# Altium PCB PCB1.PcbDoc
Units mm, origin at the board's own origin, x right, y up, seen from the top; angles counter-clockwise.
Board outline 152.4 x 101.6 mm, 2 copper layers (Top Layer, Bottom Layer); 64 components, 44 nets, 207 pads, 0 vias.
Unrouted connection lines stored in the file: 135.
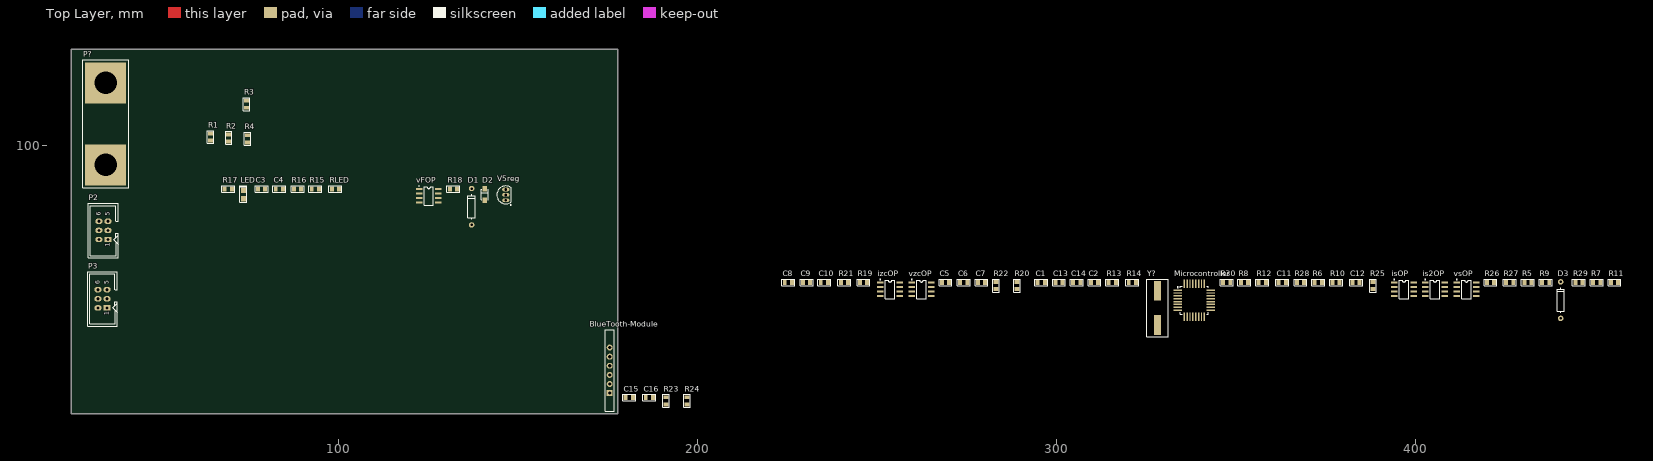
[diagram p0: Top Layer view]
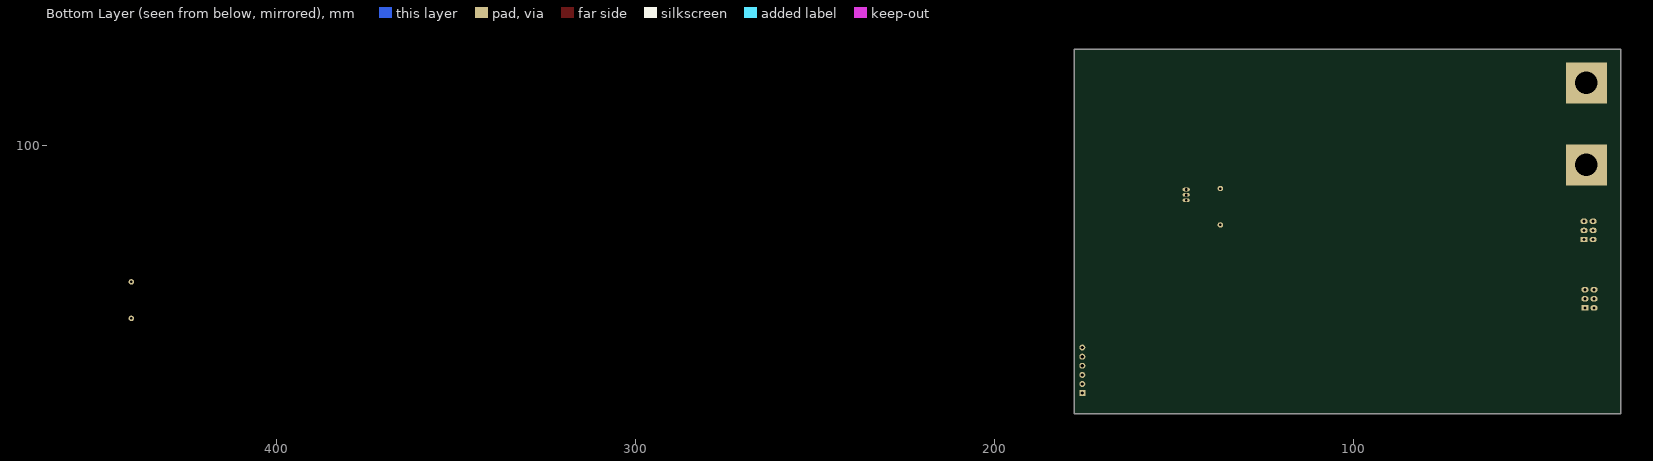
[diagram p1: Bottom Layer view, seen from below]

## Layer stack, top to bottom
Top Solder: solder mask 0.0102, Solder Resist, Dk 3.5
Top Layer: signal copper 0.0356
Dielectric 1: dielectric 0.32, FR-4, Dk 4.8
Bottom Layer: signal copper 0.0356
Bottom Solder: solder mask 0.0102, Solder Resist, Dk 3.5

## Board outline
25.4,25.4 177.8,25.4 177.8,127 25.4,127

## Design rules (kind name [scope] priority, off if disabled: settings)
Clearance [All] p1: gap=0.4 ignorepadtopadclearanceinfootprint=FALSE
Height [All] p1: minheight=0 maxheight=20 prefheight=12.7
HoleSize [All] p1: absolutevalues=TRUE maxlimit=10 minlimit=0.4 maxpercent=80.000 minpercent=20.000
PolygonConnect [All] p1: connectstyle=Relief reliefconductorwidth=0.6 reliefentries=4 polygonreliefangle="90 Angle" airgapwidth=0.4
RoutingVias [All] p1: holewidth=0.711 width=1.27 viastyle="Through Hole" minholewidth=0.711 minwidth=1.27 maxholewidth=0.711 maxwidth=1.27
SilkToSilkClearance [All] p1: silktosilkclearance=0.1
SilkToSolderMaskClearance [IsPad] p1: minsilkscreentomaskgap=0.1 clearancetoexposedcopper=TRUE
SolderMaskExpansion [All] p1: expansion=0.102 istentingtop=FALSE
SupplyNets "Schematic Supply Nets_29" [InNet('SDA')] p1: voltage=0.000
SupplyNets "Schematic Supply Nets_28" [InNet('MOSI')] p2: voltage=0.000
SupplyNets "Schematic Supply Nets_27" [InNet('Vifo')] p3: voltage=0.000
SupplyNets "Schematic Supply Nets_26" [InNet('X1')] p4: voltage=0.000
SupplyNets "Schematic Supply Nets_25" [InNet('SCL')] p5: voltage=0.000
SupplyNets "Schematic Supply Nets_24" [InNet('RST')] p6: voltage=0.000
SupplyNets "Schematic Supply Nets_23" [InNet('Vipk')] p7: voltage=0.000
SupplyNets "Schematic Supply Nets_22" [InNet('5V')] p8: voltage=0.000
SupplyNets "Schematic Supply Nets_21" [InNet('Vio')] p9: voltage=0.000
SupplyNets "Schematic Supply Nets_20" [InNet('TX')] p10: voltage=0.000
SupplyNets "Schematic Supply Nets_19" [InNet('Vio2')] p11: voltage=0.000
SupplyNets "Schematic Supply Nets_18" [InNet('Vvzc')] p12: voltage=0.000
SupplyNets "Schematic Supply Nets_17" [InNet('MISO')] p13: voltage=0.000
SupplyNets "Schematic Supply Nets_16" [InNet('OC2B')] p14: voltage=0.000
SupplyNets "Schematic Supply Nets_15" [InNet('RX')] p15: voltage=0.000
SupplyNets "Schematic Supply Nets_14" [InNet('Vio1')] p16: voltage=0.000
SupplyNets "Schematic Supply Nets_13" [InNet('Vac')] p17: voltage=0.000
SupplyNets "Schematic Supply Nets_12" [InNet('Vvo')] p18: voltage=0.000
SupplyNets "Schematic Supply Nets_11" [InNet('GND')] p19: voltage=0.000
SupplyNets "Schematic Supply Nets_10" [InNet('Vvfo')] p20: voltage=0.000
SupplyNets "Schematic Supply Nets_9" [InNet('Vref')] p21: voltage=0.000
SupplyNets "Schematic Supply Nets_8" [InNet('Vizc')] p22: voltage=0.000
SupplyNets "Schematic Supply Nets_7" [InNet('Vvs')] p23: voltage=0.000
SupplyNets "Schematic Supply Nets_6" [InNet('Vdc')] p24: voltage=0.000
SupplyNets "Schematic Supply Nets_5" [InNet('SCK')] p25: voltage=0.000
SupplyNets "Schematic Supply Nets_4" [InNet('Vin2')] p26: voltage=0.000
SupplyNets "Schematic Supply Nets_3" [InNet('X2')] p27: voltage=0.000
SupplyNets "Schematic Supply Nets_2" [InNet('OC3B')] p28: voltage=0.000
SupplyNets "Schematic Supply Nets_1" [InNet('Vis')] p29: voltage=0.000
SupplyNets "Schematic Supply Nets" [InNet('V5s')] p30: voltage=0.000
Width [All] p1: maxlimit=10 minlimit=0.4 preferedwidth=0.6
26 further rules are at their usual default settings.

## Classes and differential pairs
component class "Schematic REAL": BlueTooth-Module C1 C2 C5 C6 C7 C8 C9 C10 C11 C12 C13 C14 C15 C16 D1 D2 D3 is2OP isOP izcOP Microcontroller P2 P3 P? R1 R2 R3 R4 R5 R6 R7 R8 R9 R10 R11 R12 R13 R14 R15 R16 R17 R18 R19 R20 R23 R24 R25 R26 R27 R28 R29 R30 RLED V5reg vFOP vsOP Y?

## Components (designator, comment, footprint, x,y, rotation, side; value= is the part's Value field where it differs from the comment)
BlueTooth-Module "BLE Module Header" HM10_HDR1X6 175.514,31.115 r90 top
C1 "10n" "0805 CAP" 295.783,61.976 r0 top
C2 "10n" "0805 CAP" 310.642,61.976 r0 top
C3 "47u" "0805 CAP" 78.486,88.011 r0 top
C4 "10u" "0805 CAP" 83.439,88.011 r0 top
C5 "0.1uF" "0805 CAP" 269.113,61.976 r0 top
C6 "0.1uF" "0805 CAP" 274.193,61.976 r0 top
C7 "10uF" "0805 CAP" 279.146,61.976 r0 top
C8 "0.1uF" "0805 CAP" 225.298,61.976 r0 top
C9 "0.1uF" "0805 CAP" 230.378,61.976 r0 top
C10 "10uF" "0805 CAP" 235.331,61.976 r0 top
C11 "0.1uF" "0805 CAP" 362.966,61.976 r0 top
C12 "0.1uF" "0805 CAP" 383.54,61.976 r0 top
C13 "18pF" "0805 CAP" 300.736,61.976 r0 top
C14 "18pF" "0805 CAP" 305.689,61.976 r0 top
C15 "10n" "0805 CAP" 180.975,29.845 r0 top
C16 "10n" "0805 CAP" 186.563,29.845 r0 top
D1 "BZX79-CXVX" AXIAL-Zener-0.4 137.033,83.058 r90 top
D2 "1N4148W-7-F" SOD123 140.716,86.487 r90 top
D3 "1N4148" AXIAL-DIODE-0.4 440.563,57.023 r90 top
is2OP "TLC082" "SO - 8" 405.511,60.071 r0 top
isOP "TLC082" "SO - 8" 396.875,60.071 r0 top
izcOP "LM358" "SO - 8" 253.619,60.071 r0 top
LED "LTST-C170KGKT" "0805 LED" 73.406,86.487 r90 top
Microcontroller "ATmega328PB MCU" "32 - TQFP" 338.455,57.023 r0 top
P2 "Header 3X2" ECE-BHDR2X3 35.687,73.914 r90 top
P3 "Header 3X2" ECE-BHDR2X3 35.433,54.864 r90 top
P? "Dual Banana Plugs" "Dual Banana Plug" 35.052,106.172 r90 top
R1 "0.54" "0805 RES" 64.262,102.489 r90 top
R2 "0.54" "0805 RES" 69.342,102.235 r90 top
R3 "270k" "0805 RES" 74.295,111.649 r90 top
R4 "13k" "0805 RES" 74.549,101.981 r90 top
R5 "47k" "0805 RES" 431.419,61.976 r0 top
R6 "47k" "0805 RES" 372.999,61.976 r0 top
R7 "207k" "0805 RES" 450.596,61.976 r0 top
R8 "207k" "0805 RES" 352.425,61.976 r0 top
R9 "39k" "0805 RES" 436.372,61.976 r0 top
R10 "27k" "0805 RES" 377.952,61.976 r0 top
R11 "39k" "0805 RES" 455.549,61.976 r0 top
R12 "39k" "0805 RES" 357.378,61.976 r0 top
R13 "1.56k" "0805 RES" 315.595,61.976 r0 top
R14 "1.56k" "0805 RES" 321.183,61.976 r0 top
R15 "100" "0805 RES" 93.472,88.011 r0 top
R16 "10k" "0805 RES" 88.519,88.011 r0 top
R17 "13.8k" "0805 RES" 69.215,88.011 r0 top
R18 "33" "0805 RES" 131.953,88.011 r0 top
R19 "10k" "0805 RES" 246.253,61.976 r0 top
R20 "290k" "0805 RES" 289.052,61.087 r90 top
R21 "10k" "0805 RES" 240.919,61.976 r0 top
R22 "290k" "0805 RES" 283.21,61.087 r90 top
R23 "1.56k" "0805 RES" 191.262,28.956 r90 top
R24 "1.56k" "0805 RES" 197.104,28.956 r90 top
R25 "100k" "0805 RES" 388.239,61.087 r90 top
R26 "10k" "0805 RES" 421.005,61.976 r0 top
R27 "47k" "0805 RES" 426.339,61.976 r0 top
R28 "47k" "0805 RES" 368.046,61.976 r0 top
R29 "207k" "0805 RES" 445.643,61.976 r0 top
R30 "207k" "0805 RES" 347.472,61.976 r0 top
RLED "*" "0805 RES" 99.06,88.011 r0 top
V5reg "L78L05ACZ" TO-92 146.558,86.36 r0 top
vFOP "TLC082" "SO - 8" 125.095,86.106 r0 top
vsOP "TLC082" "SO - 8" 414.274,60.071 r0 top
vzcOP "LM358" "SO - 8" 262.382,60.071 r0 top
Y? "SMT-XTAL 16MHz" HC49-US 328.168,54.864 r90 top

## Footprints (in the part's own frame and the unit in brackets; to place one, negate y for a bottom-side part, rotate by r counter-clockwise, add the part's x,y. Pads: shape width x height; smd on the part's side, far side on the other; paste and mask are expansions set on the pad)
"32 - TQFP" [mm]
  rect 2.4x0.4 smd: 1(-4.6,2.8) 2(-4.6,2) 3(-4.6,1.2) 4(-4.6,0.4) 5(-4.6,-0.4) 6(-4.6,-1.2) 7(-4.6,-2) 8(-4.6,-2.8) 17(4.6,-2.8) 18(4.6,-2) 19(4.6,-1.2) 20(4.6,-0.4) 21(4.6,0.4) 22(4.6,1.2) 23(4.6,2) 24(4.6,2.8)
  rect 0.4x2.4 smd: 9(-2.8,-4.6) 10(-2,-4.6) 11(-1.2,-4.6) 12(-0.4,-4.6) 13(0.4,-4.6) 14(1.2,-4.6) 15(2,-4.6) 16(2.8,-4.6) 25(2.8,4.6) 26(2,4.6) 27(1.2,4.6) 28(0.4,4.6) 29(-0.4,4.6) 30(-1.2,4.6) 31(-2,4.6) 32(-2.8,4.6)
  silkscreen extent -4.74,-3.9 3.9,3.9, body extent -4.5,-4.5 4.5,4.5, height 1.3
"0805 CAP" [mm] "http://www.digikey.co.nz/Web%20Export/Supplier%20Content/Vishay_8026/PDF/VishayBeyschlag_SolderPad.pdf?redirected=1 with dimension G modified by +0.25mm"
  rect 1.1x1.4 smd: 1(-1,0) 2(1,0)
  silkscreen extent -1.8,-0.9 1.8,0.9, body extent -1.04,-0.66 1.04,0.66, height 0.61
"0805 LED" [mm] "RED AS AlGaAs SMD LED, Body; 2mm x 1.25 mm (LxW)"
  rect 1.5x1.4 smd: 1(-1.2,0) 2(1.2,0)
  silkscreen extent -2.2,-0.95 2.45,0.95, body extent -1,-0.63 1,0.63, height 1.1
"0805 RES" [mm] "http://www.digikey.co.nz/Web%20Export/Supplier%20Content/Vishay_8026/PDF/VishayBeyschlag_SolderPad.pdf?redirected=1 with dimension G modified by +0.25mm"
  rect 1.1x1.4 smd: 1(-1,0) 2(1,0)
  silkscreen extent -1.8,-0.9 1.8,0.9, body extent -1.04,-0.66 1.04,0.66, height 0.61
AXIAL-DIODE-0.4 [mil]
  round 60 hole 27.56: 1(-200,0) 2(200,0)
  silkscreen extent -138,-40 138,40, body extent -209,-34 209,34, height 73
AXIAL-Zener-0.4 [mil]
  round 60 hole 27.56: 1(-200,0) 2(200,0)
  silkscreen extent -138,-40 138,40, body extent -211,-52 211,52, height 92
"Dual Banana Plug" [mm] "Connector; 2 Position"
  rect 11.43x11.43 hole 6.35: 1(-11.43,0) 2(11.43,0)
  silkscreen extent -17.8,-6.48 17.8,6.35, body extent -17.38,-5.99 17.43,5.99, height 5.5
ECE-BHDR2X3 [mm]
  rect 1.5x2 hole 0.9: 1(0,0)
  oval 1.5x2 hole 0.9 paste-2539.97: 2(0,2.54)
  oval 1.5x2 hole 0.9: 3(2.54,0) 4(2.54,2.54) 5(5.08,0) 6(5.08,2.54)
  silkscreen extent -5.1,-2.82 10.1,5.45
HC49-US [mm] "20Mhz Crystal"
  rect 5.5x2 smd: 1(-4.75,0) 2(4.75,0)
  silkscreen extent -8,-3 8,3, body extent -4.77,-2.4 4.79,2.4, height 3.8
HM10_HDR1X6 [mil] "Connector; Header; 6 Position"
  rect 65x65 hole 35.43: 1(0,0)
  round 65 hole 35.43: 2(100,0) 3(200,0) 4(300,0) 5(400,0) 6(500,0)
  silkscreen extent -200,-50 695,50, body extent -142,-39 571,228, height 1843
"SO - 8" [mm]
  rect 1.8x0.6 smd: 1(-2.7,1.905) 2(-2.7,0.635) 3(-2.7,-0.635) 4(-2.7,-1.905) 5(2.7,-1.905) 6(2.7,-0.635) 7(2.7,0.635) 8(2.7,1.905)
  silkscreen extent -2.8,-2.7 1.3,2.8, body extent -3.1,-2.5 3.1,2.5, height 1.8
SOD123 [mm] "SOD-123; 2 Leads; Body 2.7 x 1.6 mm, (LxW)"
  rect 1.6x1.2 smd: 1(-1.65,0) 2(1.55,0)
  silkscreen extent -1.5,-1 1.5,1, body extent -1.8,-0.86 1.8,0.86, height 1.21
TO-92 [mm] "TO, Flat Index; 3 In-Line, Axial Leads; Body Dia. 4.5mm; Leads 0.51 x 0.48 mm (max)"
  oval 2x1 hole 0.8: 1(0,-1.5) 2(0,0) 3(0,1.5)
  silkscreen extent -2.48,-2.95 1.5,2.48, body extent -2.4,-2.4 1.53,2.4, height 6.73

## Part data
BlueTooth-Module: library part BLEModule_TH, "2.54mm pitch 6-pin header for BLE module", LatestRevisionDate=17-Jul-2002, LatestRevisionNote="Re-released for DXP Platform.", Publisher="Altium Limited"
C1 C2 C3 C4 C5 C6 C7 C8 C9 C10 C11 C12 C13 C14 C15 C16: library part CerCap_SMT_0805, "SMT ceramic capacitor 0805 size"
D1: library part Zener_TH_4AX0, "Axial zener diode BZX79 series", Manufacturer="Nexperia USA Inc.", Manufacturer Part Number=BZX79-C4V7,143, Operating Temperature="-65°C ~ 200°C", Package / Case="DO-204AH, DO-35, Axial", Supplier Device Package=DO-35, Supplier Part Number 1=1727-1864-1-ND, Tolerance=±5%, Category="Discrete Semiconductor Products", ComponentLink1Description=https://assets.nexperia.com/documents/data-sheet/BZX79.pdf, ComponentLink1URL=https://assets.nexperia.com/documents/data-sheet/BZX79.pdf, Mounting Type="Through Hole", Packaging="Cut Tape (CT)", Part Status=Active, Pricing 1="1=0.23, 10=0.206, 100=0.1123, 500=0.06912, 1000=0.04714 (NZD)", RoHS="RoHS Compliant", Stock 1=8933, Supplier 1=Digi-Key
D2: library part 1N4148_SMT_SOD123, "DIODE GEN PURP 100V 300MA SOD123", Base Part Number=1N4148W, Capacitance @ Vr, F="2pF @ 0V, 1MHz", Current - Average Rectified (Io)=150mA, Manufacturer="Diodes Incorporated", Manufacturer Part Number=1N4148W-13-F, Operating Temperature - Junction="-65°C ~ 150°C", Package / Case=SOD-123, Supplier Part Number 1=1N4148W-13FDICT-ND, Category="Discrete Semiconductor Products", ComponentLink1Description=https://www.diodes.com/assets/Datasheets/ds30086.pdf, ComponentLink1URL=https://www.diodes.com/assets/Datasheets/ds30086.pdf, Diode Type=Standard, Mounting Type="Surface Mount", Packaging="Cut Tape (CT)", Part Status=Active, Pricing 1="1=0.33, 10=0.292, 100=0.1586, 500=0.0976, 1000=0.06656 (NZD)", RoHS="RoHS Compliant", Speed="Small Signal =< 200mA (Io), Any Speed", Stock 1=5282, Supplier 1=Digi-Key, Supplier Device Package=SOD-123
D3: library part 1N4148_TH_4AX0, "1N4148 100V 200mA axial diode", Capacitance @ Vr, F="4pF @ 0V, 1MHz", Current - Average Rectified (Io)=200mA, Manufacturer="ON Semiconductor", Manufacturer Part Number=1N4148TR, Operating Temperature - Junction="-65°C ~ 175°C", Package / Case="DO-204AH, DO-35, Axial", Supplier Device Package=DO-35, Supplier Part Number 1=1N4148FSCT-ND, Base Part Number=1N4148, Category="Discrete Semiconductor Products", ComponentLink1Description=https://www.fairchildsemi.com/datasheets/1N/1N914.pdf, ComponentLink1URL=https://www.fairchildsemi.com/datasheets/1N/1N914.pdf, Diode Type=Standard, Mounting Type="Through Hole", Part Status=Active, Pricing 1="1=0.16, 10=0.109, 100=0.0592, 500=0.03648, 1000=0.02488 (NZD)", RoHS="RoHS Compliant", Speed="Small Signal =< 200mA (Io), Any Speed", Stock 1=1658049, Supplier 1=Digi-Key
is2OP isOP vFOP vsOP: library part TLC082_SMT_SOIC8, "IC OPAMP GP 10MHZ 8SOIC", Current - Supply=1.9mA, Manufacturer="Texas Instruments", Manufacturer Part Number=TLC082CDR, Operating Temperature="0°C ~ 70°C", Package / Case="8-SOIC (0.154\", 3.90mm Width)", Supplier Device Package=8-SOIC, Supplier Part Number 1=296-2421-1-ND, Voltage - Supply, Single/Dual (±)="4.5 V ~ 16 V, ±2.25 V ~ 8 V", Amplifier Type="General Purpose", Base Part Number=TLC082, Category="Integrated Circuits (ICs)", ComponentLink1Description=http://www.ti.com/lit/ds/symlink/tlc080a.pdf, ComponentLink1URL=http://www.ti.com/lit/ds/symlink/tlc080a.pdf, Mounting Type="Surface Mount", Output Type=-, Packaging="Cut Tape (CT)", Part Status=Active, Pricing 1="1=3.44, 10=3.087, 100=2.4808, 500=2.03822, 1000=1.68881 (NZD)", RoHS="RoHS Compliant", Slew Rate="19 V/µs", Stock 1=29765, Supplier 1=Digi-Key
izcOP vzcOP: library part LM358_SMT_SOIC8, "IC OPAMP 8SOIC", Supplier Part Number 1=296-1014-1-ND, ComponentLink1Description=http://www.ti.com/lit/ds/symlink/tlc080a.pdf, ComponentLink1URL=http://www.ti.com/lit/ds/symlink/tlc080a.pdf, Supplier 1=Digi-Key
LED: library part LED_SMT_0805, "SMT LED 0805 size", Color=Green, Current - Test=20mA, Lens Color=Colorless, Manufacturer="Lite-On Inc.", Millicandela Rating=35mcd, Package / Case="0805 (2012 Metric)", Supplier Part Number 1=160-1414-1-ND, Voltage - Forward (Vf) (Typ)=2V, Category=Optoelectronics, ComponentLink1Description=http://optoelectronics.liteon.com/upload/download/DS22-2000-073/LTST-C170KGKT.pdf, ComponentLink1URL=http://optoelectronics.liteon.com/upload/download/DS22-2000-073/LTST-C170KGKT.pdf, Features=-, Height (Max)=1.10mm, Lens Style/Size="Rectangle with Flat Top, 1.40mm x 1.25mm", Lens Transparency=Clear, Manufacturer Part Number=LTST-C170KGKT, Mounting Type="Surface Mount", Packaging="Cut Tape (CT)", Part Status=Active, Pricing 1="1=0.62, 10=0.459, 25=0.338, 100=0.2415, 250=0.16416, 500=0.14486, 1000=0.11347 (NZD)", RoHS="RoHS Compliant", Size / Dimension="2.00mm L x 1.25mm W", Stock 1=503069, Supplier 1=Digi-Key, Viewing Angle=130°, Wavelength - Dominant=571nm, Wavelength - Peak=574nm
Microcontroller: library part ATmega328PB_SMT_TQFP32, "IC MCU 8BIT 32KB FLASH 32TQFP", Manufacturer=Atmel, Manufacturer Part Number=ATMEGA328PB-AN, Operating Temperature="-40°C ~ 105°C (TA)", Package / Case=32-TQFP, Supplier Device Package="32-TQFP (7x7)", Supplier Part Number 1=ATMEGA328PB-AN-ND, Voltage - Supply (Vcc/Vdd)="1.8 V ~ 5.5 V", Category="Integrated Circuits (ICs)", ComponentLink1Description=http://www.atmel.com/images/atmel-42397-8-bit-avr-microcontroller-atmega328pb_datasheet.pdf, ComponentLink1URL=http://www.atmel.com/images/atmel-42397-8-bit-avr-microcontroller-atmega328pb_datasheet.pdf, Connectivity="I²C, SPI, UART/USART", Core Processor=AVR, Core Size=8-Bit, Data Converters="A/D 8x10b", EEPROM Size="1K x 8", Number of I/O=27, Oscillator Type=Internal, Packaging=Tray, Part Status=Active, Peripherals="Brown-out Detect/Reset, POR, PWM, WDT", Pricing 1="1=2.74, 10=2.448, 25=2.2032, 100=2.0074, 250=1.81152, 500=1.62548, 1000=1.37088 (USD)", Program Memory Size="32KB (16K x 16)", Program Memory Type=FLASH, RAM Size="2K x 8", RoHS="RoHS Compliant", Speed=20MHz, Stock 1=366, Supplier 1=Digi-Key
P?: library part AC_Output, "Dual banana plugs connection to the AC load", LatestRevisionDate=17-Jul-2002, LatestRevisionNote="Re-released for DXP Platform.", Publisher="Altium Limited"
R1 R2 R3 R4 R5 R6 R7 R8 R9 R10 R11 R12 R13 R14 R15 R16 R17 R18 R19 R20 R21 R22 R23 R24 R25 R26 R27 R28 R29 R30 RLED: library part Res_SMT_0805, "0805 resistor", ComponentLink1Description=https://nz.mouser.com/datasheet/2/315/AOA0000C304-1149620.pdf, LatestRevisionDate=17-Jul-2002, LatestRevisionNote="Re-released for DXP Platform.", PackageReference=AXIAL-0.4, Published=8-Jun-2000, Publisher="Altium Limited"
V5reg: library part L78L05_TH_TO92, "Voltage Regulator 5V", Base Part Number=LM78L05, Current - Output=100mA, Manufacturer="ON Semiconductor", Manufacturer Part Number=LM78L05ACZX, Operating Temperature="-40°C ~ 125°C", Package / Case="TO-226-3, TO-92-3 (TO-226AA) (Formed Leads)", Supplier Device Package=TO-92-3, Supplier Part Number 1=LM78L05ACZXCT-ND, Voltage - Input (Max)=30V, Voltage - Output (Max)=-, Voltage - Output (Min/Fixed)=5V, Category="Integrated Circuits (ICs)", ComponentLink1Description=https://www.fairchildsemi.com/datasheets/MC/MC78L05A.pdf, ComponentLink1URL=https://www.fairchildsemi.com/datasheets/MC/MC78L05A.pdf, Control Features=-, Mounting Type="Through Hole", Output Configuration=Positive, Output Type=Fixed, Packaging="Cut Tape (CT)", Part Status=Active, Pricing 1="1=0.69, 10=0.517, 100=0.3226, 500=0.2207, 1000=0.16976 (NZD)", Protection Features="Over Temperature, Short Circuit", PSRR="80dB (120Hz)", RoHS="RoHS Compliant", Stock 1=7782, Supplier 1=Digi-Key, Voltage Dropout (Max)=-
Y?: library part TXC9C-16_XTAL_SMT, "9C-16.000MAAJ-T crystal 16.0000MHZ 18PF SMD", Frequency Stability=±30ppm, Load Capacitance=18pF, Manufacturer="TXC CORPORATION", Manufacturer Part Number=9C-16.000MAAJ-T, Operating Mode=Fundamental, Operating Temperature="-20°C ~ 70°C", Package / Case=HC-49/US, Ratings=-, Supplier Part Number 1=887-1059-1-ND, Category="Crystals, Oscillators, Resonators", ComponentLink1Description=http://www.txccorp.com/download/products/quartz_crystals/2015TXC_9C_32.pdf, ComponentLink1URL=http://www.txccorp.com/download/products/quartz_crystals/2015TXC_9C_32.pdf, Frequency Tolerance=±30ppm, Height - Seated (Max)="0.161\" (4.10mm)", Mounting Type="Surface Mount", Packaging="Cut Tape (CT)", Part Status=Active, Pricing 1="1=0.75, 10=0.628, 50=0.5656, 100=0.5026, 500=0.47744 (NZD)", RoHS="RoHS Compliant", Size / Dimension="0.449\" L x 0.189\" W (11.40mm x 4.80mm)", Stock 1=11514, Supplier 1=Digi-Key, Type="MHz Crystal"

## Nets (pads, with @x,y where several pads share a name; then routed paths per layer and width w, separated by ;. In a path a pad name is that pad's centre, name@x,y a point inside that pad or via, vN(x,y) a via of type N, cw(c..) or ccw(c..) an arc to the next point about the centre after c; other vN are vias at no path point)
5V: BlueTooth-Module.1 C5.1 C6.1 C7.1 C8.1 C9.1 C10.1 Microcontroller.4 Microcontroller.18 Microcontroller.20 P2.2 P3.6 R26.2
GND: BlueTooth-Module.2 C1.2 C2.2 C3.2 C4.2 C5.2 C6.2 C7.2 C8.2 C9.2 C10.2 C11.2 C12.2 C13.2 C14.2 C15.2 C16.2 is2OP.4 isOP.4 izcOP.4 LED.2 Microcontroller.5 Microcontroller.21 P2.6 P3.5 R1.1 R2.1 R4.1 R5.1 R9.1 R15.1 R16.1 R25.1 R27.1 V5reg.2 vFOP.4 vsOP.4 vzcOP.4
MISO: Microcontroller.16 P2.1
MOSI: Microcontroller.15 P2.4
NetC1_1: C1.1 R13.2 R23.1
NetC2_1: C2.1 R14.2 R24.1
NetD1_1: D1.1 D2.1
NetD2_2: D2.2 R18.2
Netis2OP_2: is2OP.2 R5.2 R7.1
Netis2OP_3: is2OP.3 R6.2 R8.1
NetisOP_2: isOP.2 R27.2 R29.1
NetisOP_3: isOP.3 R28.2 R30.1
NetizcOP_3: izcOP.3 R21.2 R22.1
NetLED_1: LED.1 RLED.2
NetR9_2: R9.2 R11.1 vsOP.2
NetR10_2: R10.2 R12.1 vsOP.3
NetR16_2: R16.2 R17.2 vFOP.3
NetR19_2: R19.2 R20.1 vzcOP.3
OC2B: Microcontroller.1 P3.3
OC3B: Microcontroller.32 P3.4
RST: C11.1 Microcontroller.29 P2.5 R26.1
RX: BlueTooth-Module.3 Microcontroller.30
SCK: Microcontroller.17 P2.3
SCL: Microcontroller.28 P3.1
SDA: Microcontroller.27 P3.2
TX: BlueTooth-Module.4 Microcontroller.31
V5s: C4.1 is2OP.8 isOP.8 izcOP.8 R15.2 R17.1 V5reg.1 vFOP.8 vsOP.8 vzcOP.8
Vac: D1.2 P?.2 R3.2
Vdc: C3.1 R18.1 RLED.1 V5reg.3
Vifo: C15.1 R21.1 R23.2
Vin2: D3.1
Vio: R13.1
Vio1: isOP.1 Microcontroller.24 R29.2
Vio2: is2OP.1 Microcontroller.26 R7.2
Vipk: C12.1 D3.2 Microcontroller.25 R25.2
Vis: P?.1 R1.2 R2.2 R6.1 R28.1
Vizc: izcOP.1 R22.2
Vref: izcOP.2 Microcontroller.11 Microcontroller.19 R8.2 R12.2 R30.2 vFOP.1 vFOP.2 vzcOP.2
Vvfo: C16.1 R19.1 R24.2
Vvo: Microcontroller.10 Microcontroller.23 R11.2 R14.1 vsOP.1
Vvs: R3.1 R4.2 R10.1
Vvzc: R20.2 vzcOP.1
X1: C13.1 Microcontroller.7 Y?.1
X2: C14.1 Microcontroller.8 Y?.2
pads on no net: BlueTooth-Module.5 BlueTooth-Module.6 is2OP.5 is2OP.6 is2OP.7 isOP.5 isOP.6 isOP.7 izcOP.5 izcOP.6 izcOP.7 Microcontroller.2 Microcontroller.3 Microcontroller.6 Microcontroller.9 Microcontroller.12 Microcontroller.13 Microcontroller.14 Microcontroller.22 vFOP.5 vFOP.6 vFOP.7 vsOP.5 vsOP.6 vsOP.7 vzcOP.5 vzcOP.6 vzcOP.7

## Text inside footprints (layer, text, board x,y; h text height)
P2: Top Overlay "1" at 36.195,71.882 h1.27 r90; Top Overlay "5" at 36.195,80.518 h1.27 r90; Top Overlay "6" at 33.655,80.518 h1.27 r90
P3: Top Overlay "1" at 35.941,52.832 h1.27 r90; Top Overlay "5" at 35.941,61.468 h1.27 r90; Top Overlay "6" at 33.401,61.468 h1.27 r90